# Altium PCB Display.PcbDoc
Units mm, origin at the board's own origin, x right, y up, seen from the top; angles counter-clockwise.
Board outline 78 x 72 mm, 2 copper layers (Top Layer, Bottom Layer), stack 1.071 mm thick; 4 components, 7 nets, 25 pads, 0 vias.
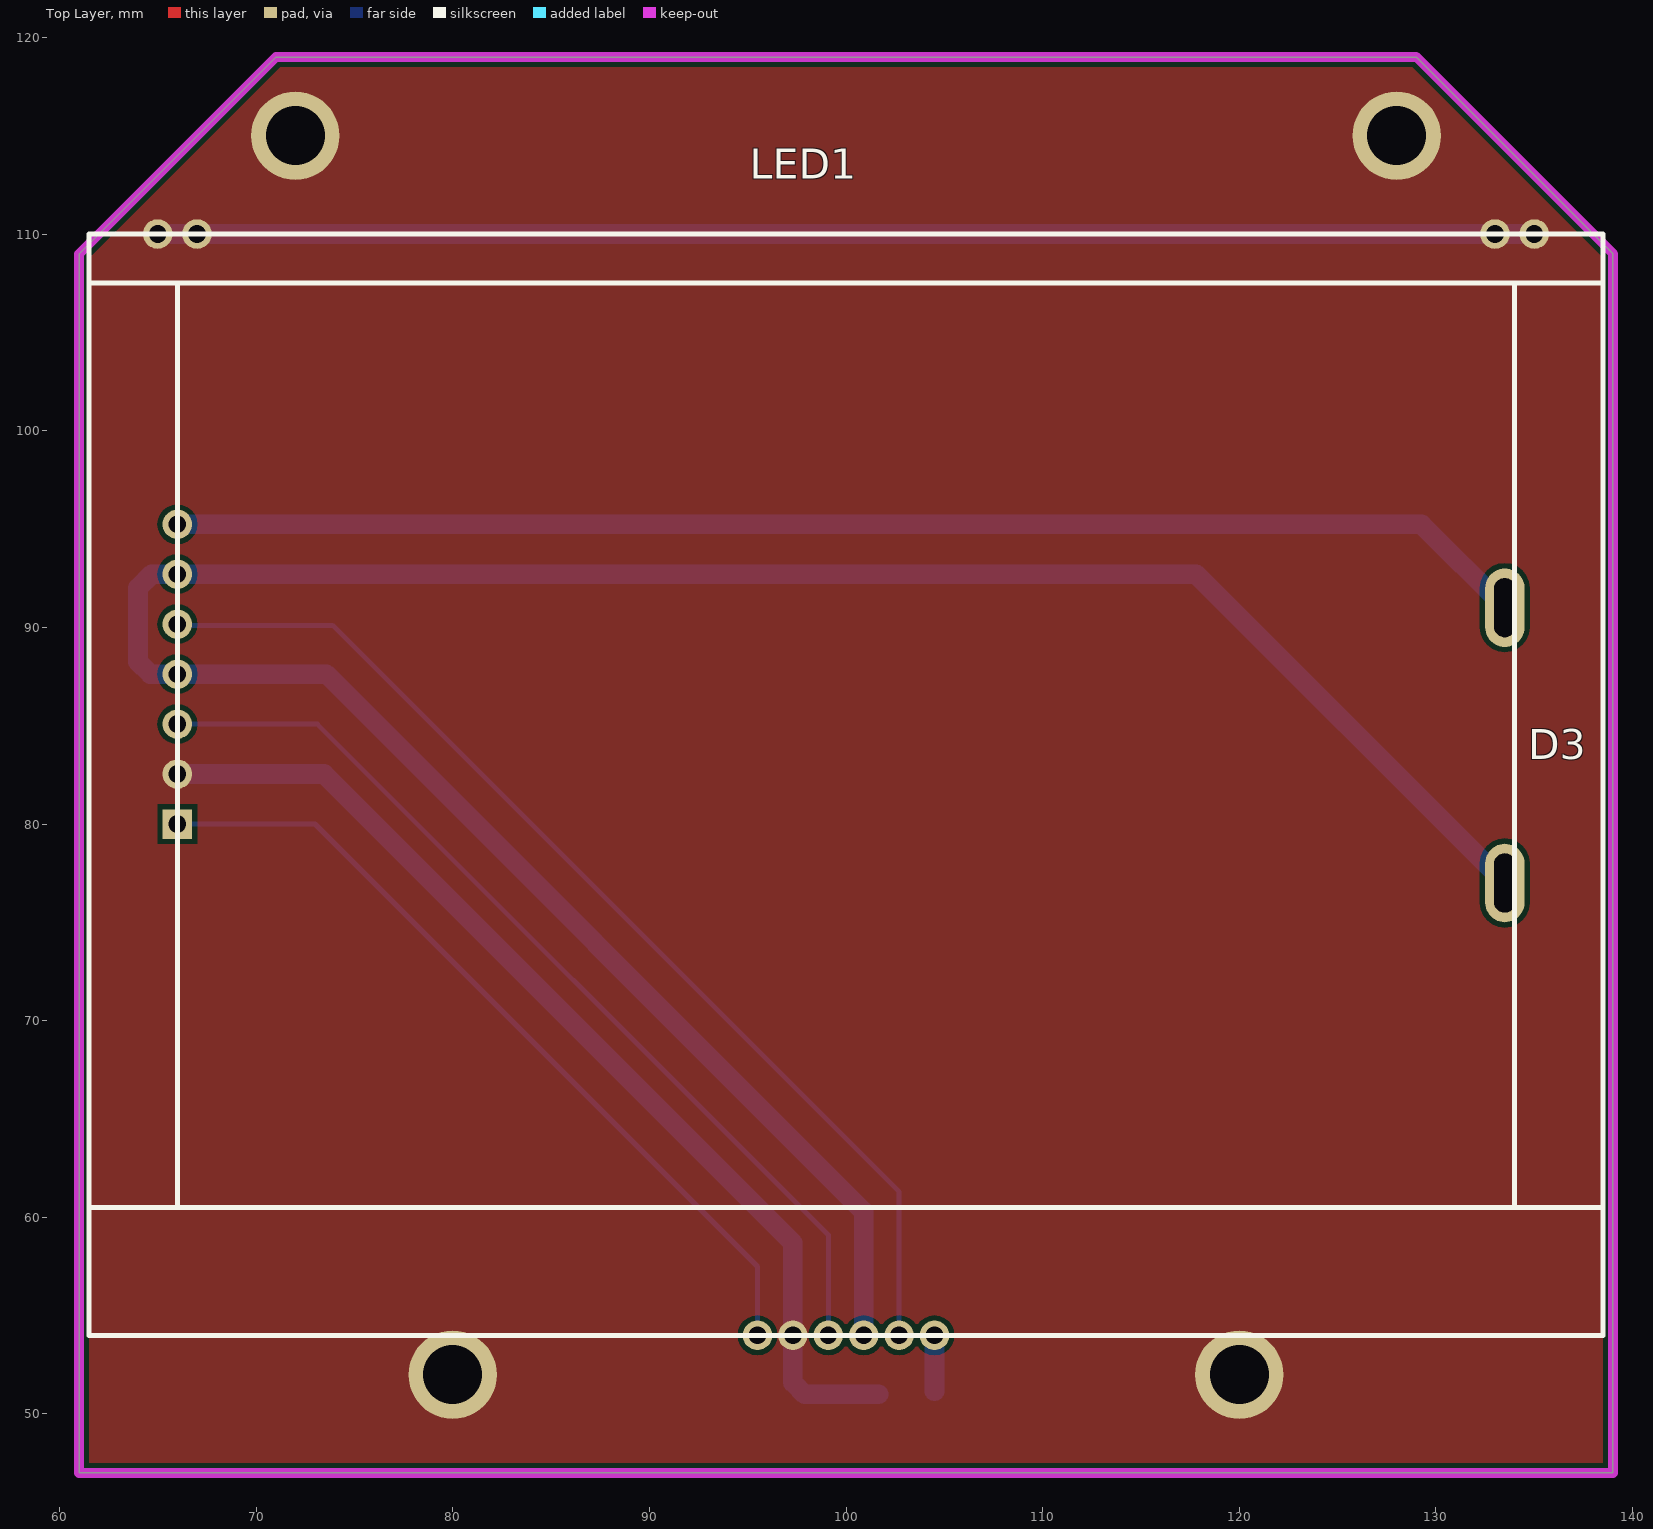
[diagram p0: Top Layer view]
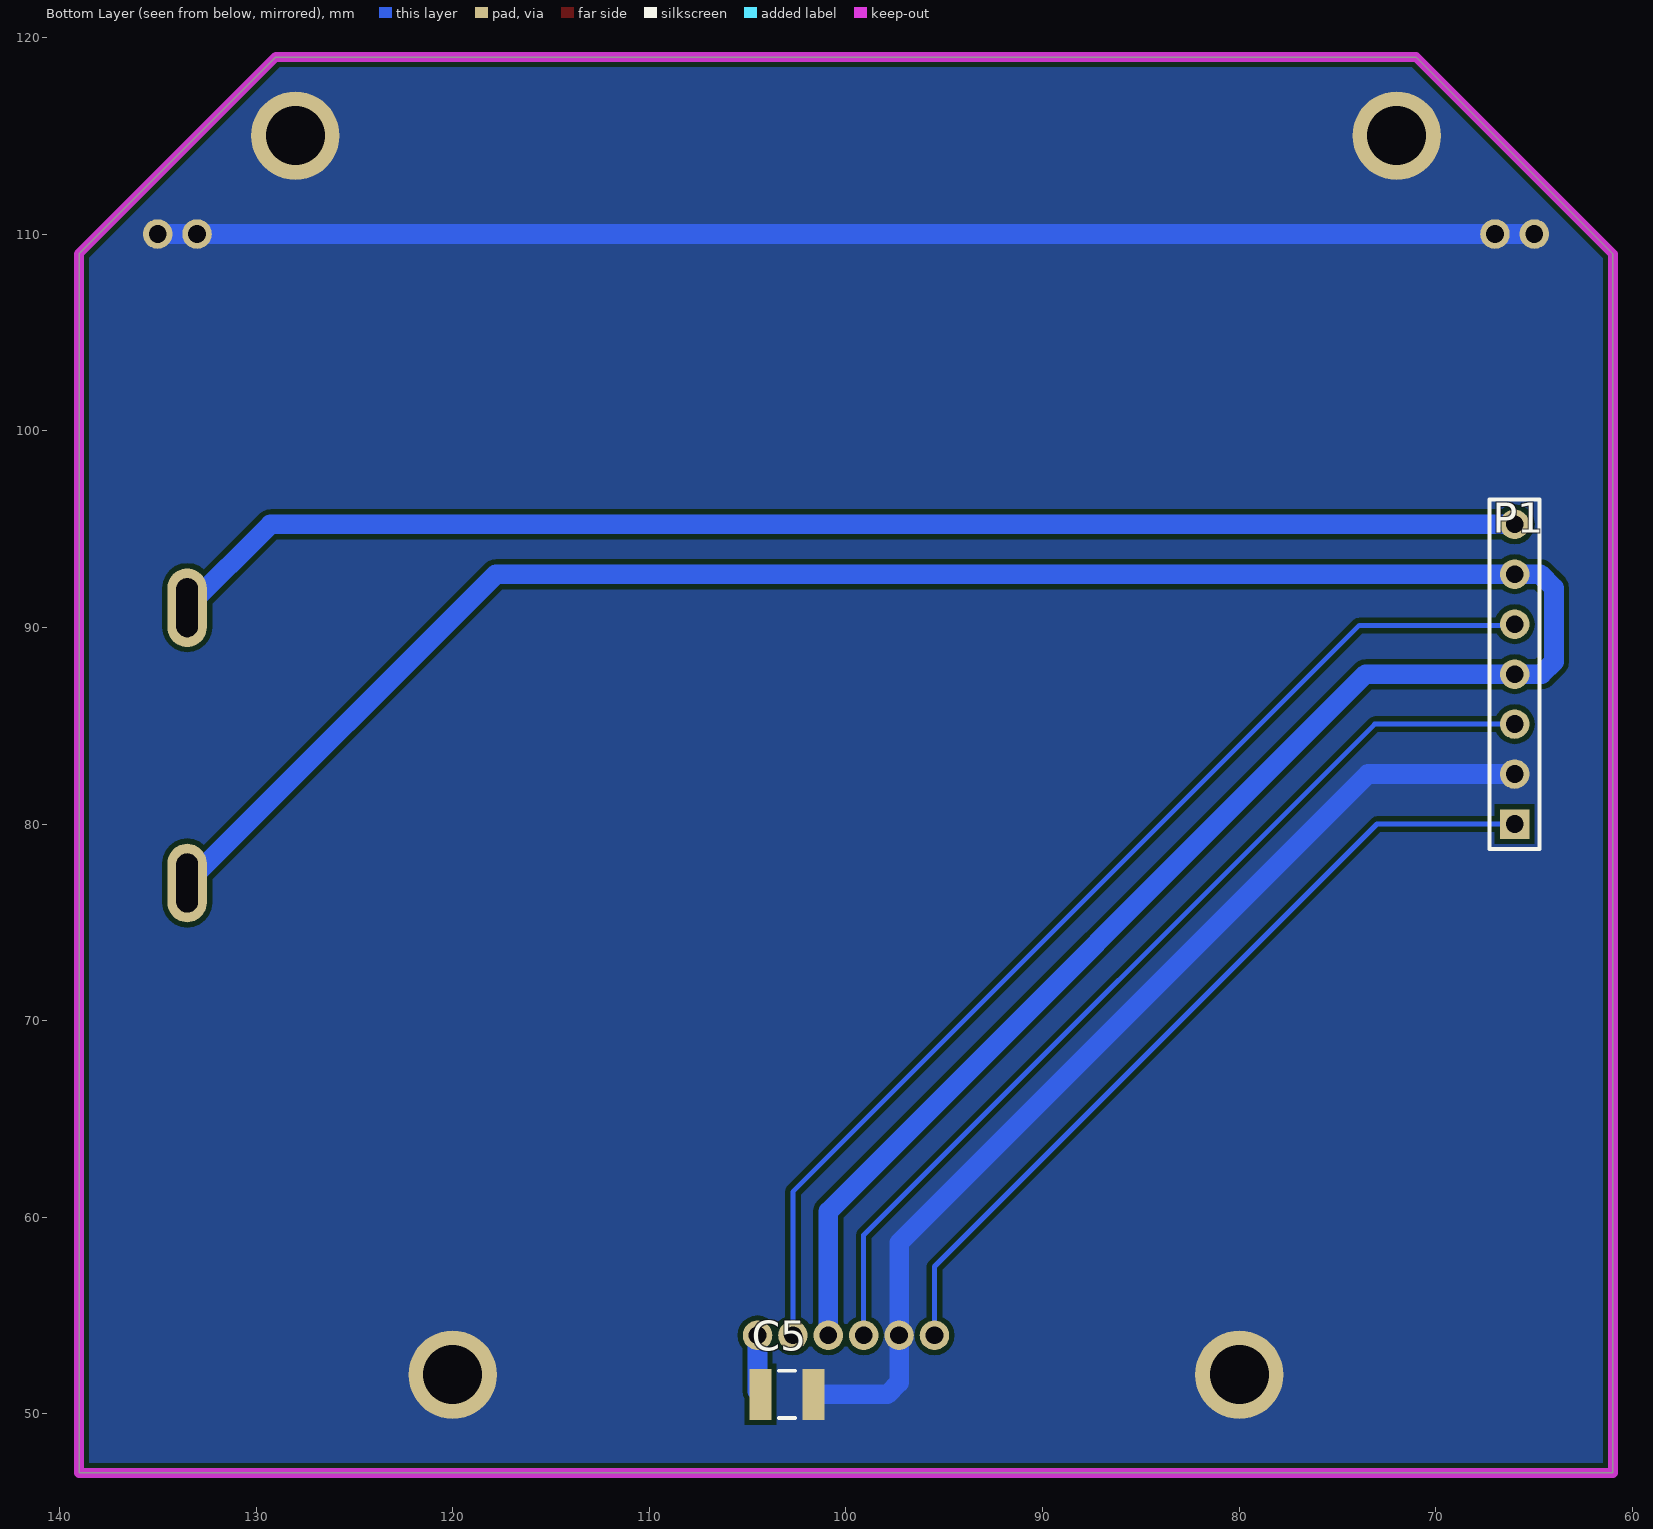
[diagram p1: Bottom Layer view, seen from below]

## Layer stack, top to bottom
Top Layer: signal copper 0.0356
Dielectric: core 1, FR-4, Dk 4.8
Bottom Layer: signal copper 0.0356

## Board outline
61,47 139,47 139,109 129,119 71.022,119 61,108.978

## Design rules (kind name [scope] priority, off if disabled: settings)
Clearance [All] p1: gap=0.254
PlaneClearance [All] p1: clearance=0.5
PlaneConnect [All] p1: planeconnectstyle=Direct reliefexpansion=0.508 reliefentries=4 reliefconductorwidth=0.254 reliefairgap=0.254
PolygonConnect [All] p1: connectstyle=Direct reliefconductorwidth=0.254 reliefentries=4 polygonreliefangle="90 Angle"
RoutingVias [All] p1: holewidth=0.711 width=1.27 viastyle="Through Hole" minholewidth=0.711 minwidth=1.27 maxholewidth=0.711 maxwidth=1.27
SMDNeckDown [All] p1: percent=200.000
SilkscreenOverComponentPads [All] p1: minsilkscreentomaskgap=0.254
SolderMaskExpansion [All] p1: expansion=0.102
Width [All] p1: maxlimit=1 minlimit=0.254 preferedwidth=0.254
25 further rules are at their usual default settings.

## Components (designator, comment, footprint, x,y, rotation, side; value= is the part's Value field where it differs from the comment)
C5 "Cap" CAPC3225L 103,51 r180 bottom
D3 "TB1065S" TB1065S 134,60.5 r180 top
LED1 "TIC218" TIC218 61.5,110 r0 top
P1 "Header 7" HDR1X7 66,80 r90 bottom

## Footprints (in the part's own frame and the unit in brackets; to place one, negate y for a bottom-side part, rotate by r counter-clockwise, add the part's x,y. Pads: shape width x height; smd on the part's side, far side on the other; paste and mask are expansions set on the pad)
CAPC3225L [mm] "Chip Capacitor, Body 3.2x2.5mm, IPC High Density"
  rect 1.1x2.6 smd: 1(-1.35,0) 2(1.35,0)
  silkscreen extent -0.4,-1.2 0.4,1.2, body extent -1.7,-1.35 1.7,1.35, height 1.5
HDR1X7 [mm] "Connector; Header; 7 Position"
  rect 1.5x1.5 hole 0.9: 1(0,0)
  round 1.5 hole 0.9: 2(2.54,0) 3(5.08,0) 4(7.62,0) 5(10.16,0) 6(12.7,0) 7(15.24,0)
  silkscreen extent -1.27,-1.27 16.51,1.27
TB1065S [mm] "Подсветка диодная для индикатора TIC218"
  oval 2x4 hole 1.1 slot 3 at 90 deg: A(0.5,-16.5) K(0.5,-30.5)
  silkscreen extent 0,-47 68,0, body extent 0,-47 68,0, height 4.5
TIC218 [mm] "Индикатор ЖК 133x64  (77x56 мм)"
  round 1.5 hole 0.9: 1(43,-56) 2(41.2,-56) 3(39.4,-56) 4(37.6,-56) 5(35.8,-56) 6(34,-56) 7(3.5,0) 7(5.5,0) 7(71.5,0) 7(73.5,0)
  silkscreen extent 0,-56 77,0, body extent 0,-56.25 77,0.26, height 8

## Part data
C5: "Capacitor"
D3: "Подсветка диодная для индикатора TIC218"
P1: "Header, 7-Pin"

## Free pads (board coordinates)
  round 4.5 hole 3: 0(72,115) 0(80,52) 0(120,52) 0(128,115)

## Nets (pads, with @x,y where several pads share a name; then routed paths per layer and width w, separated by ;. In a path a pad name is that pad's centre, name@x,y a point inside that pad or via, vN(x,y) a via of type N, cw(c..) or ccw(c..) an arc to the next point about the centre after c; other vN are vias at no path point)
GND: C5.2 LED1.5 LED1.7 P1.2 pad.0 | length 122.9
  Bottom Layer w1: LED1.7@65,110 LED1.7@135,110 ; P1.2 73.46,82.54 97.3,58.7 97.3,51.6 97.9,51 C5.2
NetC5_1: C5.1 LED1.1 | length 2.9
  Bottom Layer w1: C5.1@104.5,51.15 LED1.1
NetD3_K: D3.K P1.7 | length 69.3
  Bottom Layer w1: P1.7 129.26,95.24 D3.K
NetLED1_2: LED1.2 P1.5 | length 55.9
  Bottom Layer w0.254: P1.5@66,90.1 73.9,90.1 102.7,61.3 LED1.2
NetLED1_4: LED1.4 P1.3 | length 49
  Bottom Layer w0.254: P1.3 73.12,85.08 99.1,59.1 LED1.4
NetLED1_6: LED1.6 P1.1 | length 42.3
  Bottom Layer w0.254: P1.1 73,80 95.5,57.5 LED1.6
VCC: D3.A LED1.3 P1.4 P1.6 | length 135.1
  Bottom Layer w1: LED1.3 100.9,60.3 73.58,87.62 P1.4 64.63,87.62 64,88.25 64,92 64.7,92.7 P1.6 117.8,92.7 133,77.5 D3.A@133,76.5

## Polygon pours and split planes (outlines as drawn)
GND on Top Layer "Top Layer-No Net" (solid, remove dead copper, pour order 1000): 71,119 61,109 61,47 139,47 139,109 129,119
GND on Bottom Layer "Top Layer-No Net" (solid, remove dead copper, pour order 1001): 71,119 61,109 61,47 139,47 139,109 129,119

## Keep-outs
Keep-Out Layer:
  the board outline again, w0.5

## Silkscreen, mask and mechanical layers (free items; w line width, h text height)
Mechanical 1:
  the board outline again, w0.1